# Altium PCB PCB_SIWA.PcbDoc
Units mil, origin at the board's own origin, x right, y up, seen from the top; angles counter-clockwise.
Board outline 3543.31 x 4724.41 mil, 2 copper layers (Top Layer, Bottom Layer); 54 components, 70 nets, 251 pads, 14 vias.
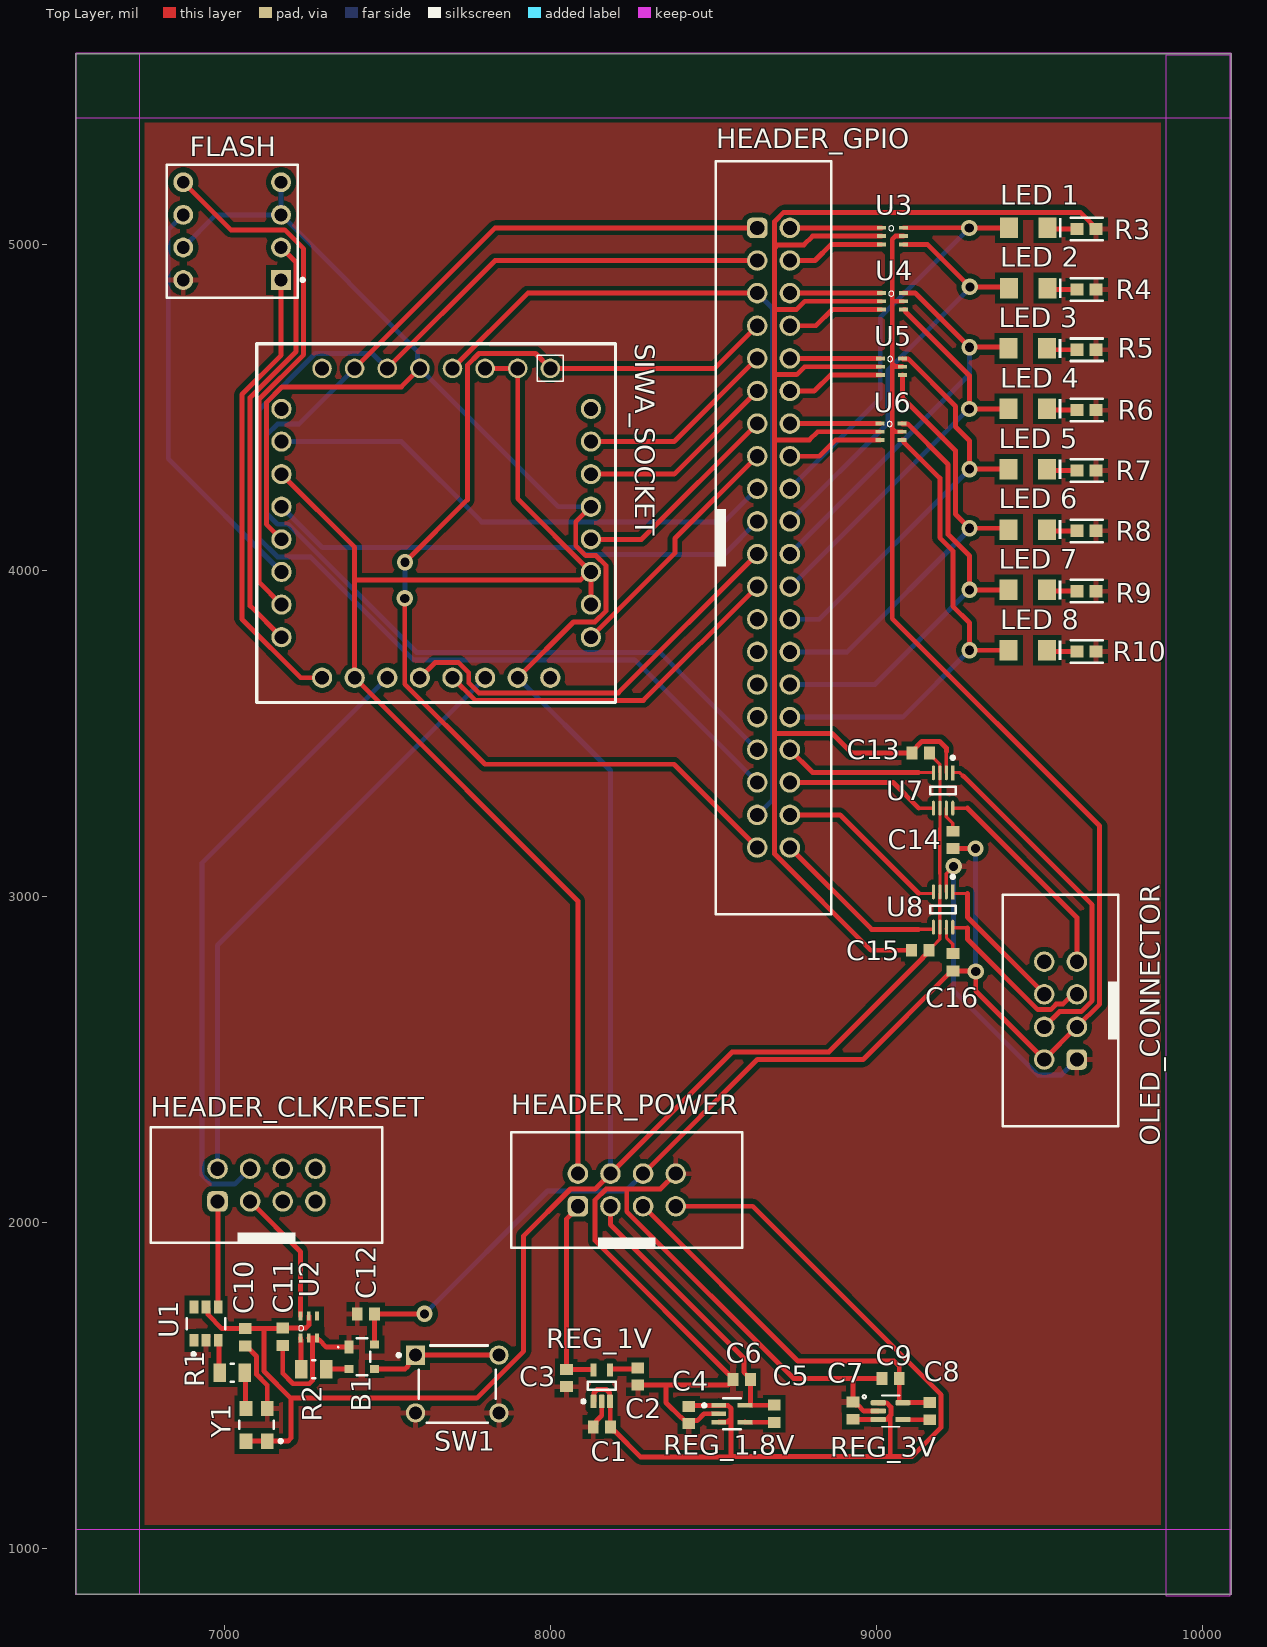
[diagram p0: Top Layer view]
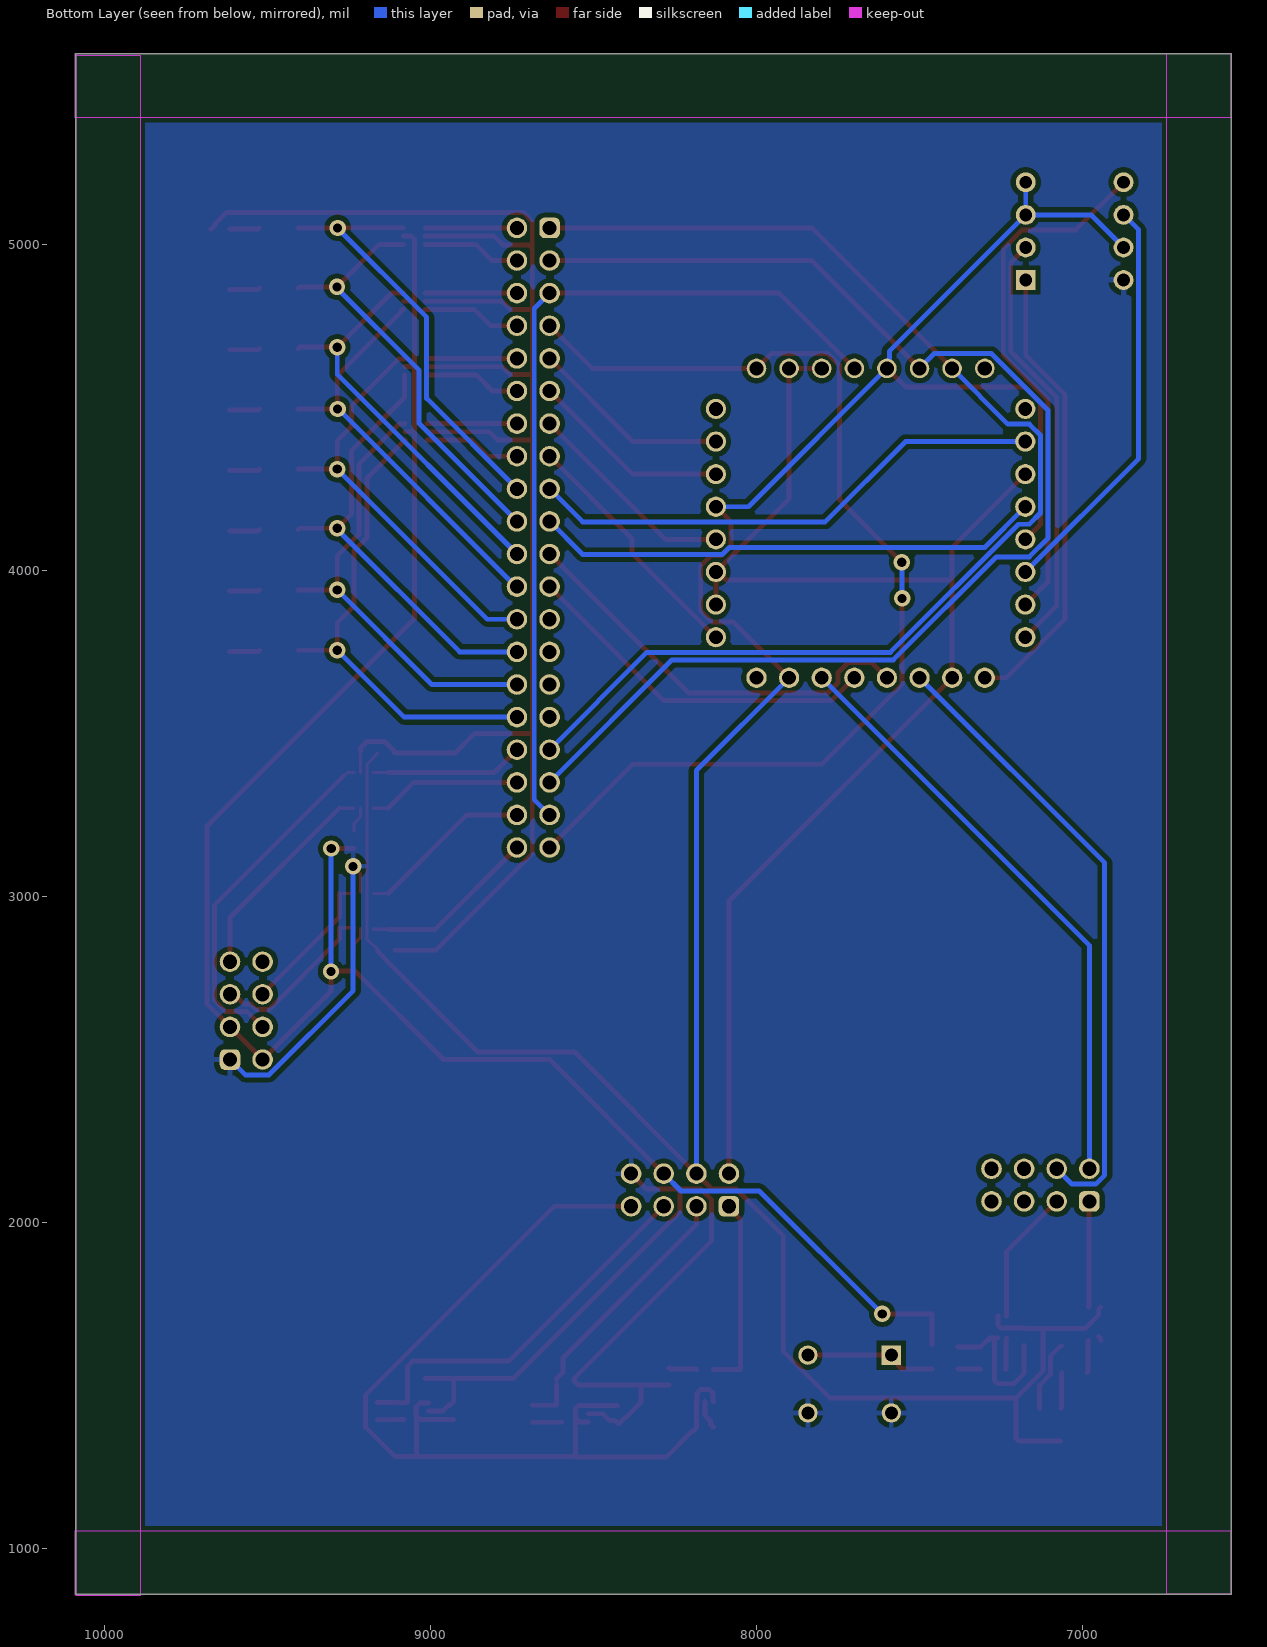
[diagram p1: Bottom Layer view, seen from below]
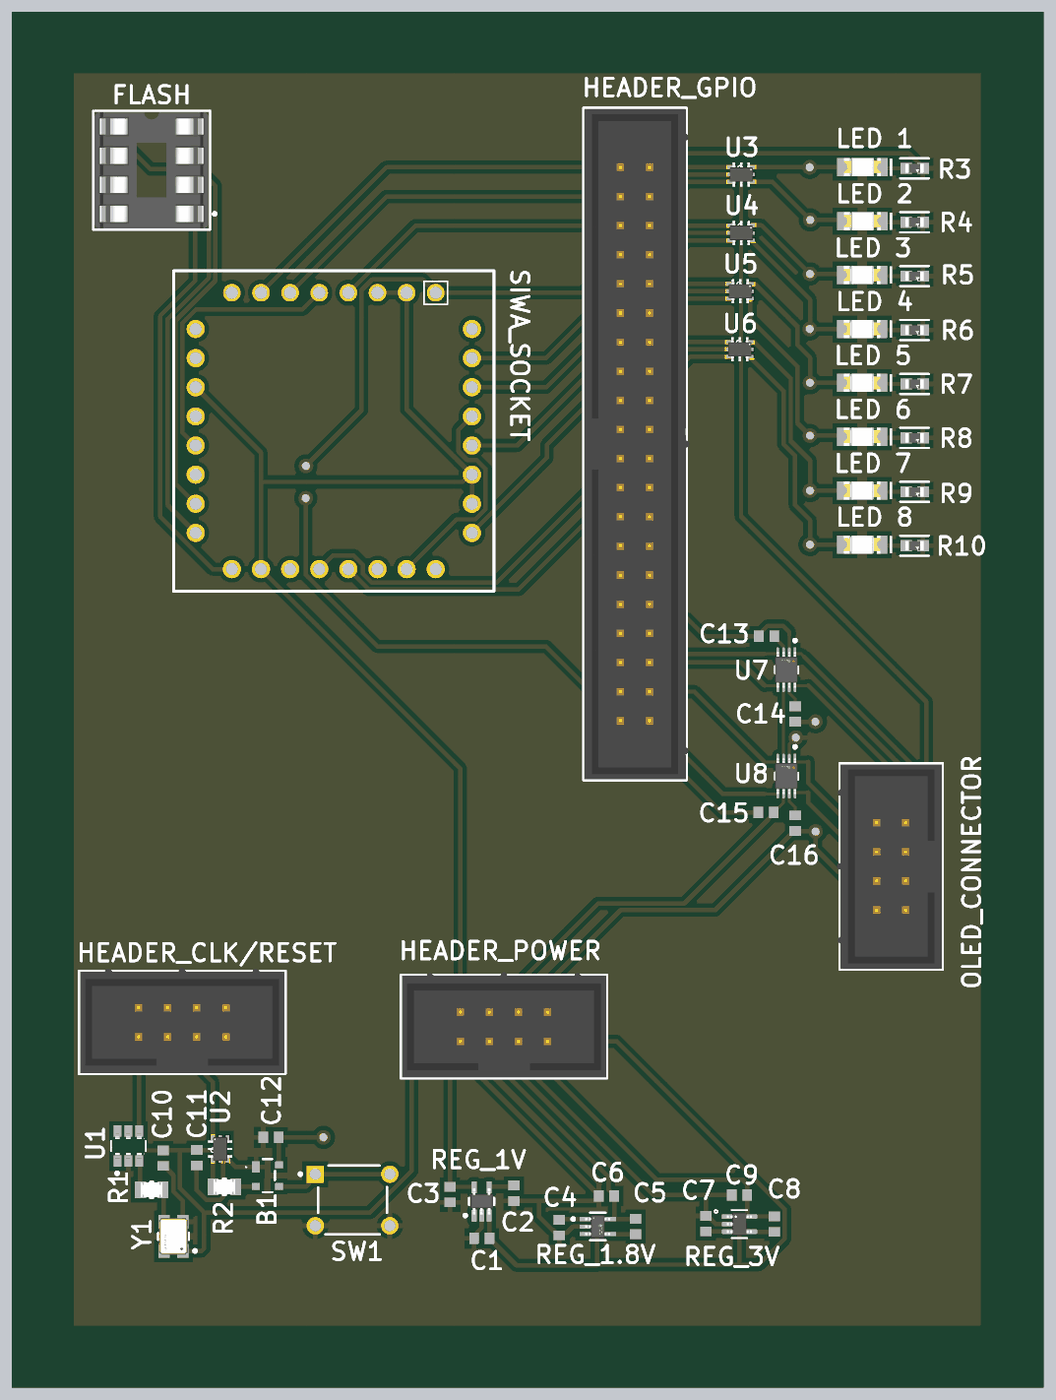
[diagram p2: 3D render of the assembled board from above, using the file's embedded part models]

## Layer stack, top to bottom
Top Solder: solder mask 0.4, Solder Resist, Dk 3.5
Top Layer: signal copper 1.4
Dielectric 1: dielectric 12.6, FR-4, Dk 4.8
Bottom Layer: signal copper 1.4
Bottom Solder: solder mask 0.4, Solder Resist, Dk 3.5

## Board outline
6545,860 6545,5584.41 10088.31,5584.41 10088.31,860

## Design rules (kind name [scope] priority, off if disabled: settings)
Clearance Polygon_Clearance_0p4mm_2 [InNamedPolygon('GND_L02_P001')] p1: gap=15 ignorepadtopadclearanceinfootprint=FALSE
Clearance Polygon_Clearance_0p4mm_1 [InNamedPolygon('GND_L01_P000')] p2: gap=15 ignorepadtopadclearanceinfootprint=FALSE
Clearance Clearance_1 [All] p3: gap=8 ignorepadtopadclearanceinfootprint=TRUE
Clearance Clearance_GND [InNet('GND')] p4: gap=16 ignorepadtopadclearanceinfootprint=TRUE
PolygonConnect [InNet('GND')] p1: connectstyle=Relief reliefconductorwidth=16 reliefentries=4 polygonreliefangle="90 Angle" airgapwidth=16
RoutingVias [All] p1: holewidth=28 width=50 viastyle="Through Hole" minholewidth=28 minwidth=50 maxholewidth=28 maxwidth=50
SolderMaskExpansion [All] p1: expansion=0 istentingtop=FALSE
Width Width_1 [All] p1: maxlimit=15 minlimit=10 preferedwidth=15
Width Width_U7/8 [InComponent('U7')And InComponent('U8')] p2: maxlimit=10 minlimit=10 preferedwidth=10
30 further rules are at their usual default settings.

## Components (designator, comment, footprint, x,y, rotation, side; value= is the part's Value field where it differs from the comment)
B1 "APX812-29UG-7" APX81229UG7 7422.8,1588.63 r270 top
C1 "VJ0603Y104KXJAP" CAPC1608X92X38NL15T08 8158.87,1373.01 r0 top
C2 "VJ0603Y104KXJAP" CAPC1608X92X38NL15T08 8268.87,1528.01 r90 top
C3 "VJ0603Y104KXJAP" CAPC1608X92X38NL15T08 8050,1523.43 r90 top
C4 "VJ0603Y104KXJAP" CAPC1608X92X38NL15T08 8425,1410 r90 top
C5 "VJ0603Y104KXJAP" CAPC1608X92X38NL15T08 8687.22,1413.79 r270 top
C6 "VJ0603Y104KXJAP" CAPC1608X92X38NL15T08 8587.22,1518.79 r0 top
C7 "VJ0603Y104KXJAP" CAPC1608X92X38NL15T08 8928.87,1423.56 r270 top
C8 "VJ0603Y104KXJAP" CAPC1608X92X38NL15T08 9163.87,1421.99 r270 top
C9 "VJ0603Y104KXJAP" CAPC1608X92X38NL15T08 9043.87,1521.99 r0 top
C10 "VJ0603Y104KXJAP" CAPC1608X92X38NL15T08 7065,1648.43 r270 top
C11 "VJ0603Y104KXJAP" CAPC1608X92X38NL15T08 7180,1650 r270 top
C12 "VJ0603Y104KXJAP" CAPC1608X92X38NL15T08 7435,1720 r180 top
C13 "VJ0603Y104KXJAP" CAPC1608X92X38NL15T08 9136.58,3440 r0 top
C14 "VJ0603Y104KXJAP" CAPC1608X92X38NL15T08 9235,3173.43 r90 top
C15 "VJ0603Y104KXJAP" CAPC1608X92X38NL15T08 9135,2835 r0 top
C16 "VJ0603Y104KXJAP" CAPC1608X92X38NL15T08 9235,2798.43 r90 top
FLASH "1-2199298-2" FP-1-2199298-2-MFG 7025,5040 r90 top
HEADER_CLK/RESET "61200821621" 61200821621 7130,2115 r0 top
HEADER_GPIO "61204021621" 61204021621 8685,4100 r270 top
HEADER_POWER "61200821621" 61200821621 8235,2100 r0 top
"LED 1" "150120BS75000" WL-SMCW_1206_150120xx75000 9465.94,5050.45 r180 top
"LED 2" "150120BS75000" WL-SMCW_1206_150120xx75000 9465.94,4865.38 r180 top
"LED 3" "150120BS75000" WL-SMCW_1206_150120xx75000 9465,4680.32 r180 top
"LED 4" "150120BS75000" WL-SMCW_1206_150120xx75000 9465,4495.25 r180 top
"LED 5" "150120BS75000" WL-SMCW_1206_150120xx75000 9465,4310.19 r180 top
"LED 6" "150120BS75000" WL-SMCW_1206_150120xx75000 9465,4125.13 r180 top
"LED 7" "150120BS75000" WL-SMCW_1206_150120xx75000 9465,3940.06 r180 top
"LED 8" "150120BS75000" WL-SMCW_1206_150120xx75000 9465,3755 r180 top
OLED_CONNECTOR "61200821621" 61200821621 9565,2650 r90 top
R1 "CRCW080550R0FKTA" FP-D12-CRCW0805-MFG 7025,1540 r180 top
R2 "CRCW080550R0FKTA" FP-D12-CRCW0805-MFG 7275,1550 r180 top
R3 "FC0603E50R0BST1" FP-FC0603-IPC_B 9645,5046.5 r0 top
R4 "FC0603E50R0BST1" FP-FC0603-IPC_B 9645,4861.43 r0 top
R5 "FC0603E50R0BST1" FP-FC0603-IPC_B 9645,4676.37 r0 top
R6 "FC0603E50R0BST1" FP-FC0603-IPC_B 9645,4491.31 r0 top
R7 "FC0603E50R0BST1" FP-FC0603-IPC_B 9645,4306.24 r0 top
R8 "FC0603E50R0BST1" FP-FC0603-IPC_B 9645,4121.18 r0 top
R9 "FC0603E50R0BST1" FP-FC0603-IPC_B 9645,3936.12 r0 top
R10 "FC0603E50R0BST1" FP-FC0603-IPC_B 9645,3751.05 r0 top
REG_1.8V "MAX8510EXK18+T" FP-X5-1-MFG 8557.22,1413.79 r0 top
REG_1V "TPS71710DCKT" DCK0005A_M 8158.28,1499.78 r90 top
REG_3V "MAX8510EXK30T" SOT65P210X110-5N 9043.87,1421.99 r0 top
SIWA_SOCKET "Comment" SIWA_socket 7650.59,4145 r270 top
SW1 "B3F-1000" OMRON-B3F-1000-4_V 7715,1505 r0 top
U1 "PL133-37TI" FP-SOT23-6LD-PL-1-MFG 6945,1690 r90 top
U2 "74LVC2G17GW,125" SOT363_INFINEON 7260,1680 r0 top
U3 "74LVC2G17GW,125" SOT363_INFINEON 9050,5025 r270 top
U4 "74LVC2G17GW,125" SOT363_INFINEON 9050,4825 r270 top
U5 "74LVC2G17GW,125" SOT363_INFINEON 9046.53,4624.41 r270 top
U6 "74LVC2G17GW,125" SOT363_INFINEON 9045,4425 r270 top
U7 "TCA9406DCUR" FP-DCU0008A-IPC_B 9205,3325 r270 top
U8 "TCA9406DCUR" FP-DCU0008A-IPC_B 9205,2960 r270 top
Y1 "ASE3-20.000MHZ-KT" FP-ASE3-MFG 7100,1380 r90 top

## Footprints (in the part's own frame and the unit in brackets; to place one, negate y for a bottom-side part, rotate by r counter-clockwise, add the part's x,y. Pads: shape width x height; smd on the part's side, far side on the other; paste and mask are expansions set on the pad)
61200821621 [mm] "8 pins, straight, gold plating"
  rrect50% 1.6x1.6 hole 1.1: 1(-3.81,-1.27)
  round 1.6 hole 1.1: 2(-3.81,1.27) 3(-1.27,-1.27) 4(-1.27,1.27) 5(1.27,-1.27) 6(1.27,1.27) 7(3.81,-1.27) 8(3.81,1.27)
  silkscreen extent -9.01,-4.5 9.01,4.5, body extent -8.91,-4.42 8.91,4.75, height 9.13
61204021621 [mm] "40 pins, straight, gold plating"
  rrect50% 1.6x1.6 hole 1.1: 1(-24.13,-1.27)
  round 1.6 hole 1.1: 2(-24.13,1.27) 3(-21.59,-1.27) 4(-21.59,1.27) 5(-19.05,-1.27) 6(-19.05,1.27) 7(-16.51,-1.27) 8(-16.51,1.27) 9(-13.97,-1.27) 10(-13.97,1.27) 11(-11.43,-1.27) 12(-11.43,1.27) 13(-8.89,-1.27) 14(-8.89,1.27) 15(-6.35,-1.27) 16(-6.35,1.27) 17(-3.81,-1.27) 18(-3.81,1.27) 19(-1.27,-1.27) 20(-1.27,1.27) 21(1.27,-1.27) 22(1.27,1.27) 23(3.81,-1.27) 24(3.81,1.27) 25(6.35,-1.27) 26(6.35,1.27) 27(8.89,-1.27) 28(8.89,1.27) 29(11.43,-1.27) 30(11.43,1.27) 31(13.97,-1.27) 32(13.97,1.27) 33(16.51,-1.27) 34(16.51,1.27) 35(19.05,-1.27) 36(19.05,1.27) 37(21.59,-1.27) 38(21.59,1.27) 39(24.13,-1.27) 40(24.13,1.27)
  silkscreen extent -29.33,-4.5 29.33,4.5, body extent -29.23,-4.42 29.23,4.75, height 9.13
APX81229UG7 [mm]
  rect 1x0.7 smd: 1(-0.75,-1)
  rect 0.6x0.7 smd: 2(0.95,-1) 3(0.95,1) 4(-0.95,1)
  silkscreen extent -1.45,-1.9 1.45,0.65
CAPC1608X92X38NL15T08 [mm] "Chip Capacitor, 2-Leads, Body 1.60x0.80mm, IPC Medium Density"
  rect 0.85x1 smd: 1(-0.675,0) 2(0.675,0)
  body extent -0.87,-0.48 0.87,0.47, height 0.92
DCK0005A_M [mm] "SOT23, 5-Leads, Body 2.15x1.4mm, Pitch 0.65mm, IPC Low Density"
  rrect22% 1.05x0.45 smd: 1(-1.225,0.65) 2(-1.225,0) 3(-1.225,-0.65) 4(1.225,-0.65) 5(1.225,0.65)
  silkscreen extent -1.35,-1.1 0.3,1.55, body extent -1.14,-1 1.14,1, height 0.94
FP-1-2199298-2-MFG [mm]
  rect 1.55x1.55 hole 1 paste-2539.97 mask+0: 1(-3.81,-3.81)
  round 1.55 hole 1 paste-2539.97 mask+0: 2(-1.27,-3.81) 3(1.27,-3.81) 4(3.81,-3.81) 5(3.81,3.81) 6(1.27,3.81) 7(-1.27,3.81) 8(-3.81,3.81)
  silkscreen extent -5.18,-5.62 5.18,5.1, body extent -5.28,-5.2 5.28,5.2, height 0.25
FP-ASE3-MFG [mm]
  rect 1.2x1 smd paste+0 mask+0: 1(-1.27,-0.825) 2(1.27,-0.825) 3(1.27,0.825) 4(-1.27,0.825)
  silkscreen extent -1.39,-2 0.29,1.35, body extent -1.97,-1.45 1.97,1.45, height 0.25
FP-D12-CRCW0805-MFG [mm]
  rect 0.95x1.45 smd paste+0 mask+0: 1(-0.975,0) 2(0.975,0)
  silkscreen extent -0.13,-0.7 0.13,0.7, body extent -1.55,-0.82 1.55,0.82, height 0.25
FP-DCU0008A-IPC_B [mm]
  rect 1.16x0.237 smd paste+0 mask+0: 1(-1.376,0.75)
  rrect100% 1.16x0.237 smd paste+0 mask+0: 2(-1.376,0.25) 3(-1.376,-0.25) 4(-1.376,-0.75) 5(1.376,-0.75) 6(1.376,-0.25) 7(1.376,0.25) 8(1.376,0.75)
  silkscreen extent -2.67,-1 0.3,1, body extent -2.21,-1.25 2.21,1.25, height 0.25
FP-FC0603-IPC_B [mil]
  rect 40.04x37.38 smd paste+0 mask+0: 1(-28.92,0) 2(28.92,0)
  silkscreen extent -49,-34 49,34, body extent -59,-29 59,29, height 10
FP-SOT23-6LD-PL-1-MFG [mm]
  rect 0.99x0.69 smd: 1(-1.295,0.95) 2(-1.295,0) 3(-1.295,-0.95) 4(1.295,-0.95) 5(1.295,0) 6(1.295,0.95)
  silkscreen extent -2.5,-1.5 0.42,1.5, body extent -1.89,-1.6 1.89,1.6, height 0.25
FP-X5-1-MFG [mm]
  rect 1.15x0.35 smd paste+0 mask+0: 1(-1.025,0.65) 2(-1.025,0) 3(-1.025,-0.65) 4(1.025,-0.65) 5(1.025,0.65)
  silkscreen extent -2.27,-1.2 0.67,1.2, body extent -1.7,-1.2 1.7,1.2, height 0.25
OMRON-B3F-1000-4_V [mm] "TH, 4-Leads, Body 6x6mm"
  rect 1.5x1.5 hole 1 paste-2539.97: 1(-3.25,2.25)
  round 1.5 hole 1 paste-2539.97: 2(3.25,2.25) 3(-3.25,-2.25) 4(3.25,-2.25)
  silkscreen extent -4.67,-3 3,3, body extent -3,-3 3,3, height 4.5
SIWA_socket [mil]
  round 60 hole 43.31: 01(-474.41,-350) 05(-474.41,350) 06(-474.41,250) 07(-474.41,150) 08(-474.41,50) 09(-474.41,-50) 10(-474.41,-150) 13(-474.41,-250)
  round 62 hole 42 paste-99999 mask+0: 21(-250,-474.41) 22(-150,-474.41) 24(-50,-474.41) 25(50,-474.41) 26(150,-474.41) 28(250,-474.41) 29(350,-474.41) 32(-350,-474.41) 36(474.41,-350) 37(474.41,-250) 38(474.41,-150) 39(474.41,-50) 40(474.41,50) 42(474.41,150) 44(474.41,250) 48(474.41,350) 49(-350,474.41) 53(350,474.41) 54(250,474.41) 55(150,474.41) 56(50,474.41) 57(-50,474.41) 58(-150,474.41) 61(-250,474.41)
  silkscreen extent -550,-550 550,550
SOT65P210X110-5N [mm]
  rrect50% 1.19x0.4 smd: 1(-0.96,0.65) 2(-0.96,0) 3(-0.96,-0.65) 4(0.96,-0.65) 5(0.96,0.65)
  silkscreen extent -2.17,-1.22 0.68,1.24, body extent -1.1,-1 1.1,1, height 1.1
SOT363_INFINEON [mm]
  rect 0.3x0.7 smd paste+0 mask+0.102: 1(-0.65,-0.85) 2(0,-0.85) 3(0.65,-0.85) 4(0.65,0.85) 5(0,0.85) 6(-0.65,0.85)
  silkscreen extent -0.8,-0.3 -0.4,0.1, body extent -1.05,-1.02 1.05,1.02, height 1.1
WL-SMCW_1206_150120xx75000 [mm] "SMD Mono-color Chip LED, body 3.2x1.6mm"
  rect 1.4x1.6 smd: 1(-1.5,0) 2(1.5,0)
  silkscreen extent -2.6,-0.75 -2.4,0.75, body extent -1.6,-0.8 1.6,0.8, height 0.68

## Part data
B1: "Supervisor Push-Pull, Totem Pole 1 Channel SOT-143 , 2.93V , 140ms , -40C ~ 85C (TA)", Manufacturer_Name="Diodes Incorporated", Datasheet Link=https://www.diodes.com//assets/Datasheets/APX811_812.pdf, Geometry.Height=1.1mm, Manufacturer_Part_Number=APX812-29UG-7
C1 C2 C3 C4 C5 C6 C7 C8 C9 C10 C11 C12 C13 C14 C15 C16: library part CMP-2006-01211-1, Manufacturer=Vitramon, Part Number=VJ0603Y104KXJAP
FLASH: library part CMP-03370-000009-1, "CONN IC DIP SOCKET 8POS TIN", Color=Black, Contact Current Rating=1A, Contact Resistance=20mR, Flammability Rating="UL94 V-0", Insulation Resistance=1GR, Max Operating Temperature=105°C, Min Operating Temperature=-40°C, Package Quantity=60, Connector Type=Pin, Contact Finish - Mating=TIN, Contact Material=Bronze, Contact Plating=Tin, Contact Post Length=3inch, ELV=Compliant, Housing Material=PBT, Lead Free="Lead Free", Lead Pitch=2.54mm, Length=0.4inch, Mating Alignment="Yes (With)", Mount="Through Hole", Number of Contacts=8, Number of Positions=8, Number of Rows=2, Orientation=Straight, Packaging=Rail/Tube, Pitch=2.54mm, Radiation Hardening=No, RoHS Compliant=Yes, Row Spacing=0.3inch, Series="Diplomate DL", Termination="Through Hole"
HEADER_CLK/RESET HEADER_POWER OLED_CONNECTOR: library part CMP-1502-00006-3, "Wr-bhd; 2.54MM Pitch 8 Way 2 Row Shrouded Straight Pcb Header, Surface Mount", Color=Black, Contact Resistance=20mΩ, Current Rating=3A, Insulation Resistance=1GΩ, Max Operating Temperature=105°C, Min Operating Temperature=-40°C, Operating Supply Voltage=250V, Connector Type="Male Pin", Contact Material=Copper, Contact Plating=Gold, Gender=Male, Insulation Material=PBT, Lead Pitch=2.54mm, Length=17.82mm, Mount="Through Hole", Number of Contacts=8, Number of Pins=8, Number of Positions=8, Number of Rows=2, Orientation=Vertical, Pitch=2.54mm, RoHS=Compliant, Row Spacing=2.54mm, Termination=Solder
HEADER_GPIO: library part CMP-1502-00015-4, "WR-BHD Straight Male, Box Header, Through Hole, 2 Rows, 40 Contacts, 2.54mm Pitch", Color=Black, Contact Resistance=20mΩ, Current Rating=3A, Insulation Resistance=1GΩ, Max Operating Temperature=105°C, Min Operating Temperature=-40°C, Operating Supply Voltage=250V, Connector Type="Male Pin", Contact Material=Gold, Contact Plating=Gold, Gender=Male, Height=9.25mm, Insulation Material=PBT, Lead Pitch=2.54mm, Length=58.46mm, Mount="Through Hole", Number of Contacts=40, Number of Pins=40, Number of Positions=40, Number of Rows=2, Orientation=Vertical, Pitch=2.54mm, REACH SVHC=Unknown, RoHS=Compliant, Row Spacing=2.54mm, Termination=Solder, Voltage Rating=250V
"LED 1" "LED 2" "LED 3" "LED 4" "LED 5" "LED 6" "LED 7" "LED 8": library part CMP-1426-00015-3, "WL-SMCW SMT Mono-Color Chip LED Waterclear", Case Code (Imperial)=1206, Case Code (Metric)=3216, Color=Blue, Forward Current=100mA, Forward Voltage=3.2V, Manufacturer Package Identifier=LED_1206, Max Operating Temperature=85°C, Max Reverse Voltage (DC)=5V, Min Operating Temperature=-40°C, Test Current=20mA, Case/Package=1206, Dominant Wavelength=470nm, Height=680µm, Length=3.2mm, Lens Style="Clear, Rectangular", Luminous Intensity=145mcd, Mount="Surface Mount", Packaging="Tape and Reel", Peak Wavelength=465nm, REACH SVHC=Unknown, RoHS=Compliant, Viewing Angle=140°, Wavelength=470nm, Width=1.6mm
R1 R2: library part CMP-00030-21390498-1, "CRCW080550R0FKTA Res Thick Film 0805 50 Ohm 1% 0.125W(1/8W) ±100ppm/C Pad SMD Automotive T/R", Case Code (Imperial)=0805, Case Code (Metric)=2012, Max Operating Temperature=155°C, Min Operating Temperature=-55°C, Power Rating=125mW, Resistance=50Ω, Temperature Coefficient=100ppm/°C, Tolerance=1%, Voltage Rating=150V, Case/Package=0805, Composition="Thick Film", Contact Plating="Lead, Tin", Height=450µm, Lead Free="Contains Lead", Length=2mm, NexarPartId=21390498, RoHS=Non-Compliant, Weight=5.499807mg, Width=1.25mm
R3 R4 R5 R6 R7 R8 R9 R10: library part CMP-02407-013076-1, "RES SMD 50 OHM 0.1% 1/8W 0603"
REG_1.8V: library part CMP-0246-00401-2, "IC REG LINEAR 1.8V 120MA SC70-5", Case/Package=SC, Input Bias Current=40uA, Max Input Voltage=6V, Max Operating Temperature=85°C, Max Output Current=120mA, Max Power Dissipation=247mW, Min Current Limit=130mA, Min Input Voltage=2V, Min Operating Temperature=-40°C, Nominal Output Voltage=1.8V, Package Quantity=2500, Power Supply Rejection Ratio (PSRR)=54dB, Quiescent Current=90uA, Reference Voltage=1.225V, Accuracy=2%, Lead Free="Lead Free", Mount="Surface Mount", Number of Outputs=1, Number of Pins=5, Number of Regulators=1, Output Configuration=Positive, Output Current=120mA, Output Type=Fixed, Output Voltage=1.8V, Packaging="Tape and Reel", Polarity=Positive, RoHS Compliant=Yes, Series=-
REG_1V: library part CMP-0394-00843-2, "Single Output High PSRR LDO, 150 mA, Fixed 1 V Output, 2.5 to 6.5 V Input, with Low IQ, 5-pin SC70 (DCK), -40 to 85 degC, Green (RoHS & no Sb/Br)", Manufacturer="Texas Instruments", Accuracy(%)=3, Code_JEDEC=MO-203, ComponentLink1Description="Manufacturer URL", ComponentLink1URL=http://www.ti.com/, ComponentLink2Description=Datasheet, ComponentLink2URL=http://www.ti.com/general/docs/lit/getliterature.tsp?genericPartNumber=TPS71710&fileType=pdf, ComponentLink3Description="Package Specification", ComponentLink3URL=http://www.ti.com/litv/pdf/mpds025f, DatasheetVersion=SBVS068G, Eco-Plan="Green (RoHS & no Sb/Br)", Fixed Output Options(V)=1, Iout(Max)(A)=0.15, Iq(Typ)(mA)=0.05, Mounting Technology="Surface Mount", PackageDescription="5-Pin Plastic Small-Outline, Body 2 x 1.25 mm, Pitch 0.65 mm", PackageReference=DCK0005A, PackageVersion=4093553-3/G, PartNumber=TPS71710DCKT, SubFamily="Single Channel LDO", Vdo(Typ)(mV)=170, Vin(Max)(V)=6.5, Vin(Min)(V)=2.5, Vout Adj(Max)(V)=1, Vout Adj(Min)(V)=1
REG_3V: "DoÄŸrusal Voltaj RegÃ¼latÃ¶rÃ¼ IC Pozitif Sabit 1 Ã‡Ä±kÄ±ÅŸ 120mA SC-70-5", Package="SC-70-5 Maxim", Check_prices=https://www.snapeda.com/parts/MAX8510EXK30+T/Maxim+Integrated/view-part/?ref=eda, MF="Maxim Integrated Products", MP=MAX8510EXK30+T, SnapEDA_Link=https://www.snapeda.com/parts/MAX8510EXK30+T/Maxim+Integrated/view-part/?ref=snap
SW1: library part CMP-1677-00002-1, "Tactile Switch, SPST-NO, 0.05 A, 5 to 24 V, -25 to 70 degC, 4-Pin THD, RoHS, Bulk", Capacitance="-45 f", Current Rating="1.5 A", Max Operating Temperature="70 degC", Min Operating Temperature="-40 degC", Package Quantity=1080, Voltage Rating="150 V", ComponentLink1Description="Manufacturer URL", ComponentLink1URL=http://www.omron.com/, ComponentLink2Description=Datasheet, ComponentLink2URL=http://www.omron.com/ecb/products/pdf/en-b3f.pdf, Contact Material=Brass, Contact Plating=Gold, DatasheetVersion=Jan-15, Gender=Female, Height="14.99 mm", Lead Pitch="1.27 mm", Length="18.34 mm", Mount="Through Hole", PackageDescription="4-Pin Through Hole Device, Body 6 x 6 mm", PackageReference=B3F-1000, Packaging=Tray, Pins=8, Radiation Hardening=No, RoHSCompliant=true, Shielding=Shielded, Width="25.4 mm"
U1: library part CMP-00252-66952958-1, "PL133-37TI LVCMOS Sine Wave PL133 SOT-23-6 R-PDSO-G6 clock driver 0.95mm 1.62V~3.63V 150MHz -40C~85C", Max Frequency=150MHz, Max Operating Temperature=85°C, Max Supply Voltage=3.63V, Min Operating Temperature=-40°C, Min Supply Voltage=1.62V, Height=1.45mm, Input=LVCMOS, Lead Free="Lead Free", Lifecycle Status=Production, Logic Function=Inverting, Mount="Surface Mount", Number of Circuits=1, Number of Elements=1, Number of Inputs=1, Number of Outputs=3, RoHS=Compliant, Schedule B="8542390000, 8542390000"
U2 U3 U4 U5 U6: "Buffer, Non-Inverting 2 Element 1 Bit per Element Push-Pull Output 6-TSSOP", Package="TSSOP6-6 Nexperia USA Inc.", Check_prices=https://www.snapeda.com/parts/74LVC2G17GW,125/Nexperia/view-part/?ref=eda, MF="Nexperia USA", MP=74LVC2G17GW,125, SnapEDA_Link=https://www.snapeda.com/parts/74LVC2G17GW,125/Nexperia/view-part/?ref=snap
U7 U8: library part CMP-0314-00417-3, "IC TRNSLTR BIDIRECTIONAL US8", Case/Package=VSSOP, High Level Output Current=-50mA, Low Level Output Current=50mA, Max Operating Temperature=85°C, Max Supply Voltage=5.5V, Min Operating Temperature=-40°C, Min Supply Voltage=1.65V, Package Quantity=1, Contact Plating=Gold, Data Rate=24Mbps, Height=0.8mm, Lead Free="Lead Free", Length=2.1mm, Logic Function=Translator, Number of Bits=2, Number of Channels=2, Number of Outputs=2, Number of Pins=8, Output Type=Voltage, Packaging="Tape and Reel", Propagation Delay=4.4ns, Radiation Hardening=No, REACH SVHC="No SVHC", Turn-On Delay Time=260ns, Weight=0.00067oz, Width=2.4mm
Y1: library part CMP-27762-010045-1, "XTAL OSC XO 20.0000MHZ CMOS SMD", Case/Package=SMD/SMT, Frequency=20MHz, Frequency Stability=30ppm, Load Capacitance=15pF, Max Operating Temperature=70°C, Max Supply Current=4mA, Max Supply Voltage=1.89V, Min Operating Temperature=-10°C, Min Supply Voltage=1.71V, Operating Supply Voltage=1.8V, Package Quantity=1000, Depth=2.5mm, Height=0.049inch, Lead Free="Lead Free", Length=3.2mm, Mount="Surface Mount", Number of Pins=4, Packaging="Tape and Reel", Radiation Hardening=No, Series=ASE3, Termination=SMD/SMT, Width=0.098inch

## Via types
v1: diameter 50, hole 28, Top Layer to Bottom Layer, tented both sides, 14 vias

## Nets (pads, with @x,y where several pads share a name; then routed paths per layer and width w, separated by ;. In a path a pad name is that pad's centre, name@x,y a point inside that pad or via, vN(x,y) a via of type N, cw(c..) or ccw(c..) an arc to the next point about the centre after c; other vN are vias at no path point)
CLK: HEADER_CLK/RESET.2 SIWA_SOCKET.42 | length 1845.5
  Bottom Layer w15: HEADER_CLK/RESET.2 6980,2850 SIWA_SOCKET.42
GND: B1.1 C1.1 C2.1 C3.1 C4.1 C6.1 C7.1 C9.1 C10.2 C11.2 C12.2 C13.1 C15.1 FLASH.8 HEADER_POWER.8 OLED_CONNECTOR.1 R3.2 R4.2 R5.2 R6.2 R7.2 R8.2 R9.2 R10.2 REG_1.8V.2 REG_1V.2 REG_3V.2 SW1.3 SW1.4 U1.2 U2.2 U2.3 U3.2 U4.2 U5.2 U6.2 U7.2 U8.2 Y1.2 | length 10055.7
  Top Layer w10: U8.2 9214.84,3069.84 v1(9237.27,3092.27) ; U7.2 9214.84,3444.84
  Top Layer w15: U1.2 6945,1644.92 U1.2@6951.32,1651.24 ; C10.2 7067.95,1621.85 7099.5,1590.3 7099.5,1534.62 7132.48,1501.64 Y1.2 ; C11.2 7180,1537.45 7211.49,1505.96 7261.74,1505.96 7270.81,1515.04 7270.81,1644.56 7272.8,1646.54 ; U2.2 7272.8,1646.54 ; B1.1 7313.97,1618.15 7291.87,1640.26 7287.18,1640.26 7285.59,1641.85 U2.3 7272.8,1646.54 ; C1.1 8141.53,1382.24 8141.53,1391.63 8158.28,1408.39 REG_1V.2 ; C2.1 8355,1501.44 ; HEADER_POWER.8 8338,2103 8235,2103 ; REG_1.8V.2 8471.72,1413.79 8450.6,1392.66 8434.23,1392.66 C4.1 8422.05,1383.43 8402.21,1403.27 8399.97,1403.27 8355,1448.24 8355,1501.44 ; REG_3V.2 8962.21,1421.99 8943.29,1440.9 8938.1,1440.9 C7.1 8928.87,1520.86 8930,1521.99 ; U6.2 8820,4425 8795,4400 8688,4400 ; U5.2 8780.42,4624.41 8756.01,4600 8688,4600 ; U4.2 8781.01,4825 8756.01,4800 8688,4800 ; U3.2 8805,5025 8778,4998 8698,4998 8688,4988 ; C9.1 8930,1521.99 ; C15.1 8983.54,2835 8688,3130.53 8688,3500 ; C13.1@9108.88,3444.07 9140,3475.19 9194.81,3475.19 9214.84,3455.16 9214.84,3444.84 ; C13.1@9110,3442.95 C13.1 8924.39,3440 8864.39,3500 8688,3500 ; R3.2 9672.59,5046.5 9661.4,5057.69 9661.4,5061.82 9651.6,5071.61 9625.77,5097.44 8715.98,5097.44 8688,5069.47 8688,4988 ; 8235,2103 8235,2033.54 8746.55,1521.99 8930,1521.99 ; 8235,2103 8171.54,2103 8138,2069.47 8138,1944.38 8560.64,1521.74 C6.1 8560.64,1515.83 8546.25,1501.44 8355,1501.44 ; 8688,3500 8688,4400 ; 8688,4400 8688,4600 ; 8688,4600 8688,4800 ; 8688,4800 8688,4988
  Bottom Layer w15: v1(9237.27,3092.27) 9237.27,2711.27 9495.53,2453 9568,2453 OLED_CONNECTOR.1
GPIO_0: HEADER_GPIO.1 HEADER_GPIO.33 SIWA_SOCKET.13 | length 3813.1
  Top Layer w15: SIWA_SOCKET.13 7831.18,5050 HEADER_GPIO.1
  Bottom Layer w15: SIWA_SOCKET.13 7229.68,4448.5 7163.92,4448.5 7129.68,4414.26 7129.68,4175.74 7163.92,4141.5 7197.15,4141.5 7590.15,3748.5 8336.5,3748.5 HEADER_GPIO.33
GPIO_1: HEADER_GPIO.3 HEADER_GPIO.35 SIWA_SOCKET.10 | length 3987
  Top Layer w15: SIWA_SOCKET.10 7831.18,4950 HEADER_GPIO.3
  Bottom Layer w15: SIWA_SOCKET.10 7455.09,4664.91 7280.33,4664.91 7106.68,4491.26 7106.68,4098.74 7163.92,4041.5 7264.63,4041.5 7580.63,3725.5 8259.5,3725.5 HEADER_GPIO.35
GPIO_2: HEADER_GPIO.5 HEADER_GPIO.37 SIWA_SOCKET.08 | length 2668.9
  Top Layer w15: SIWA_SOCKET.08 7931.18,4850 HEADER_GPIO.5
  Bottom Layer w15: HEADER_GPIO.37 8682,3297 8682,4803 HEADER_GPIO.5
GPIO_3: HEADER_GPIO.7 HEADER_GPIO.39 SIWA_SOCKET.05 | length 3322.6
  Top Layer w15: v1(7554.09,3914.09) 7554.09,3651.33 7800.16,3405.26 8379.74,3405.26 HEADER_GPIO.39 ; v1(7555,4025) 7746.09,4216.09 7746.09,4629.26 7781.74,4664.91 7955.09,4664.91 SIWA_SOCKET.05 8504.41,4619.41 HEADER_GPIO.7
  Bottom Layer w15: v1(7554.09,3914.09) 7554.55,3914.55 7554.55,4024.55 v1(7555,4025)
GPIO_4: HEADER_GPIO.9 SIWA_SOCKET.61 | length 615.6
  Top Layer w15: SIWA_SOCKET.61 8380,4395 HEADER_GPIO.9
GPIO_5: HEADER_GPIO.11 SIWA_SOCKET.58 | length 615.6
  Top Layer w15: SIWA_SOCKET.58 8380,4295 HEADER_GPIO.11
GPIO_6: HEADER_GPIO.13 SIWA_SOCKET.56 | length 657
  Top Layer w15: SIWA_SOCKET.56 8280,4095 HEADER_GPIO.13
GPIO_7: HEADER_GPIO.15 SIWA_SOCKET.53 | length 766.2
  Top Layer w15: SIWA_SOCKET.53 8382.66,4052.66 8382.66,4097.66 HEADER_GPIO.15
"LED 1": "LED 1.2" HEADER_GPIO.18 U3.6 | length 1354.4
  Top Layer w15: U3.6 v1@9286.75,5050.59 ; v1(9285,5050) 9406.44,5050 9406.89,5050.45
  Bottom Layer w15: HEADER_GPIO.18 9012.19,4527.19 9012.19,4775.74 v1@9286.89,5050.45
"LED 2": "LED 2.2" HEADER_GPIO.20 U3.4 | length 1322.9
  Top Layer w15: U3.4 9156.8,4999.41 v1(9286.89,4869.32) 9402.95,4869.32 9406.89,4865.38
  Bottom Layer w15: HEADER_GPIO.20 9035.19,4450.19 9035.19,4613.68 v1@9286.89,4865.38
"LED 3": "LED 3.2" HEADER_GPIO.22 U4.6 | length 1255.5
  Top Layer w15: U4.6 9119.61,4850.59 v1(9285.94,4684.26) 9402.01,4684.26 9405.94,4680.32
  Bottom Layer w15: HEADER_GPIO.22 9285.94,4600.94 v1(9285.94,4684.26)
"LED 4": "LED 4.2" HEADER_GPIO.24 U4.4 | length 1286.4
  Top Layer w15: U4.4 9088.15,4799.41 9089.74,4797.82 9089.74,4793.13 9285.94,4596.93 9285.94,4495.94 v1(9285,4495) 9405.69,4495 9405.94,4495.25
  Bottom Layer w15: HEADER_GPIO.24 8737.84,3950 v1@9283.1,4495.25
"LED 5": "LED 5.2" HEADER_GPIO.26 U5.6 | length 1296.1
  Top Layer w15: U5.6 9081.59,4648.41 9097.61,4648.41 9242.88,4503.13 9242.88,4440.19 9285.94,4397.13 v1(9285.94,4310.19) 9405.94,4310.19
  Bottom Layer w15: HEADER_GPIO.26 8825.75,3850 v1(9285.94,4310.19)
"LED 6": "LED 6.2" HEADER_GPIO.28 U5.4 | length 1383
  Top Layer w15: U5.4 9080,4530 9242.88,4367.12 9242.88,4172.12 v1(9285.94,4129.06) 9402.01,4129.06 9405.94,4125.13
  Bottom Layer w15: HEADER_GPIO.28 8910.82,3750 v1@9285.94,4125.13
"LED 7": "LED 7.2" HEADER_GPIO.30 U6.6 | length 1396.9
  Top Layer w15: U6.6 9080.06,4449 9096.08,4449 9219.88,4325.19 9219.88,4110.21 9285.94,4044.15 v1(9285.94,3940.06) 9405.94,3940.06
  Bottom Layer w15: HEADER_GPIO.30 8995.88,3650 v1(9285.94,3940.06)
"LED 8": "LED 8.2" HEADER_GPIO.32 U6.4 | length 1489
  Top Layer w15: U6.4 9083.15,4399.41 9084.74,4397.82 9084.74,4393.13 9195,4282.88 9195,4100 9235,4060 9235,3890 9285.94,3839.06 v1(9285.94,3755) 9405.94,3755
  Bottom Layer w15: HEADER_GPIO.32 9080.94,3550 v1(9285.94,3755)
MAIP: HEADER_GPIO.21 SIWA_SOCKET.39 | length 1287.1
  Top Layer w15: SIWA_SOCKET.39 7647.09,3717.09 7719.85,3717.09 7750.59,3686.35 7750.59,3654.83 7781.33,3624.09 8209.09,3624.09 HEADER_GPIO.21
MISO: FLASH.2 SIWA_SOCKET.29 | length 1312.3
  Top Layer w15: FLASH.2 7221.01,4943.99 7221.01,4671.01 7080,4530 7080,3891.18 SIWA_SOCKET.29
MOSI: FLASH.5 SIWA_SOCKET.28 | length 1630.2
  Top Layer w15: FLASH.5 7021.01,5043.99 7186.08,5043.99 7244.01,4986.06 7244.01,4661.12 7106.68,4523.79 7106.68,3964.5 SIWA_SOCKET.28
NetB1_2: B1.2 R2.1 | length 70.5
  Top Layer w15: R2.1 7314.61,1551.23 B1.2
NetB1_3: B1.3 SW1.1 SW1.2 | length 404.7
  Top Layer w15: B1.3 7555.59,1551.23 7561.42,1557.05 7565.02,1560.65 7565.02,1571.55 SW1.1 SW1.2
NetC2_2: C2.2 REG_1V.4 | length 88.9
  Top Layer w15: REG_1V.4 8183.87,1549.94 8185.23,1551.3 8265.58,1551.3 C2.2
NetC3_2: C3.2 HEADER_POWER.1 REG_1V.5 | length 598.4
  Top Layer w15: HEADER_POWER.1 8085,2045.54 8050,2010.54 C3.2 8131.33,1550 8132.69,1548.64 REG_1V.5
NetC5_1: C5.1 C6.2 HEADER_POWER.3 REG_1.8V.5 | length 846.5
  Top Layer w15: HEADER_POWER.3 8185,1993.77 8593.95,1584.82 8593.95,1541.58 8613.79,1521.74 C6.2 ; C6.2@8613.79,1503.79 8613.79,1439.99 8613.67,1439.87 8686.72,1439.87 C5.1
NetC5_2: C5.2 REG_1.8V.4 | length 90.1
  Top Layer w15: REG_1.8V.4 8598.06,1387.7 8686.72,1387.7 C5.2
NetC8_1: C8.1 C9.2 HEADER_POWER.5 REG_3V.5 | length 1194.2
  Top Layer w15: HEADER_POWER.5 8760,1575 9055,1575 9070.44,1559.56 C9.2 9070.44,1447.95 9070.82,1447.58 REG_3V.5 9097.22,1447.58 9098.2,1448.56 C8.1
NetC8_2: C8.2 REG_3V.4 | length 82.6
  Top Layer w15: REG_3V.4 9097.22,1396.4 9098.2,1395.41 C8.2
NetC14_2: C14.2 U7.7 | length 79.2
  Top Layer w10: U7.7 9214.84,3244.17 9234.5,3224.51 9234.5,3200.5 C14.2
NetC16_2: C16.2 U8.7 | length 84.2
  Top Layer w10: U8.7@9214.68,2900.83 9215.02,2900.49 9215.02,2873.83 9234.68,2854.17 9234.68,2825.32 C16.2
NetHEADER_CLK/RESET_1: HEADER_CLK/RESET.1 U1.4 | length 325
  Top Layer w15: HEADER_CLK/RESET.1 6981.2,2063.8 6981.2,1742.18 U1.4
NetHEADER_CLK/RESET_3: HEADER_CLK/RESET.3 U2.6 | length 415.5
  Top Layer w15: HEADER_CLK/RESET.3 7234.41,1910.59 U2.6
"NetLED 1_1": "LED 1.1" R3.1 | length 92.7
  Top Layer w15: 9525,5050.45 9528.95,5046.5 R3.1
"NetLED 2_1": "LED 2.1" R4.1 | length 92.7
  Top Layer w15: 9525,4865.38 9528.95,4861.43 R4.1
"NetLED 3_1": "LED 3.1" R5.1 | length 93.7
  Top Layer w15: 9524.06,4680.32 9528,4676.37 R5.1
"NetLED 4_1": "LED 4.1" R6.1 | length 93.7
  Top Layer w15: 9524.06,4495.25 9528,4491.31 R6.1
"NetLED 5_1": "LED 5.1" R7.1 | length 93.7
  Top Layer w15: 9524.06,4310.19 9528,4306.24 R7.1
"NetLED 6_1": "LED 6.1" R8.1 | length 93.7
  Top Layer w15: 9524.06,4125.13 9528,4121.18 R8.1
"NetLED 7_1": "LED 7.1" R9.1 | length 93.7
  Top Layer w15: 9524.06,3940.06 9528,3936.12 R9.1
"NetLED 8_1": "LED 8.1" R10.1 | length 93.7
  Top Layer w15: 9524.06,3755 9528,3751.05 R10.1
NetR1_1: R1.1 Y1.3 | length 111.7
  Top Layer w15: R1.1 7065.45,1537.93 7065.45,1432.07 Y1.3
NetR1_2: R1.2 U1.3 | length 100.8
  Top Layer w15: U1.3 6984.51,1636.91 6984.51,1542.11 R1.2
NetR2_2: R2.2 U2.1 | length 97.4
  Top Layer w15: U2.1 7234.41,1641.36 7235.51,1640.26 7235.51,1551.1 R2.2
POC_CON: HEADER_GPIO.23 SIWA_SOCKET.40 | length 1107.7
  Top Layer w15: SIWA_SOCKET.40 7770.09,3601.09 8286.09,3601.09 HEADER_GPIO.23
RES: OLED_CONNECTOR.7 U7.8 | length 654.9
  Top Layer w10: U7.8 9279.66,3270.83
  Top Layer w15: 9279.66,3270.83 9615,2935.49 OLED_CONNECTOR.7
Reset: HEADER_CLK/RESET.4 SIWA_SOCKET.38 | length 1938
  Bottom Layer w15: HEADER_CLK/RESET.4 7033,2118 6960.53,2118 6933,2145.53 6933,3103 SIWA_SOCKET.38
SA0: OLED_CONNECTOR.4 U7.1 | length 1070.1
  Top Layer w10: U7.1 9234.53,3379.66 9234.87,3380 9256.01,3380 9266.24,3369.77
  Top Layer w15: 9266.24,3369.77 9662,2974.01 9662,2680.53 9628.46,2647 9562,2647 OLED_CONNECTOR.4
SCL: OLED_CONNECTOR.5 U8.8 | length 528
  Top Layer w10: U8.8@9234.37,2900.83 9234.37,2903.83 9234.71,2904.17 9279.68,2904.17
  Top Layer w15: 9279.68,2904.17 9279.68,2868.85 9495.53,2653 9534.47,2653 9551.46,2670 9572.01,2670 9602.01,2700 OLED_CONNECTOR.5
SCLK: FLASH.6 SIWA_SOCKET.26 | length 1257.9
  Bottom Layer w15: FLASH.6 6828.99,5043.99 6828.99,4342.19 SIWA_SOCKET.26
SCS: FLASH.1 SIWA_SOCKET.36 | length 1409.4
  Top Layer w15: FLASH.1 7175,4660 7055,4540 7055,3850.42 7234.83,3670.59 SIWA_SOCKET.36
SDA: OLED_CONNECTOR.6 U8.1 | length 452
  Top Layer w10: U8.1@9234.37,3009.17 9279.68,3009.17
  Top Layer w15: 9279.68,3009.17 9279.68,2936.7 9515,2701.38 OLED_CONNECTOR.6
SIWA_LED1: HEADER_GPIO.2 U3.1 | length 281.8
  Top Layer w15: HEADER_GPIO.2 8735.29,5050.29 9016.24,5050.29 U3.1
SIWA_LED2: HEADER_GPIO.4 U3.3 | length 302
  Top Layer w15: HEADER_GPIO.4 8812.19,4950 8861.6,4999.41 U3.3
SIWA_LED3: HEADER_GPIO.6 U4.1 | length 281.8
  Top Layer w15: HEADER_GPIO.6 8735.3,4850.3 9016.24,4850.3 U4.1
SIWA_LED4: HEADER_GPIO.8 U4.3 | length 302
  Top Layer w15: HEADER_GPIO.8 8815,4750 8864.41,4799.41 U4.3
SIWA_LED5: HEADER_GPIO.10 U5.1 | length 278.1
  Top Layer w15: HEADER_GPIO.10 U5.1
SIWA_LED6: HEADER_GPIO.12 U5.3 | length 298.3
  Top Layer w15: HEADER_GPIO.12 8810,4550 8858.82,4598.82 U5.3
SIWA_LED7: HEADER_GPIO.14 U6.1 | length 276.8
  Top Layer w15: HEADER_GPIO.14 8735.3,4450.3 9011.24,4450.3 U6.1
SIWA_LED8: HEADER_GPIO.16 U6.3 | length 297
  Top Layer w15: HEADER_GPIO.16 8825,4350 8874.41,4399.41 U6.3
SIWA_RES: HEADER_GPIO.36 U7.5 | length 473.3
  Top Layer w10: 9130.34,3270.83 U7.5
  Top Layer w15: HEADER_GPIO.36 9051.17,3350 9130.34,3270.83
SIWA_SA0: HEADER_GPIO.34 U7.4 | length 470.1
  Top Layer w10: 9130,3380 9175.13,3380 9175.47,3379.66 U7.4
  Top Layer w15: HEADER_GPIO.34 8805,3380 9130,3380
SIWA_SCL: HEADER_GPIO.40 U8.5 | length 545.7
  Top Layer w10: 9129.68,2899.17 9174.97,2899.17 9175.31,2899.51 U8.5@9175.31,2900.83
  Top Layer w15: HEADER_GPIO.40 8985.83,2899.17 9129.68,2899.17
SIWA_SDA: HEADER_GPIO.38 U8.4 | length 540.1
  Top Layer w10: 9129.68,3009.17 U8.4@9175.31,3009.17
  Top Layer w15: HEADER_GPIO.38 8888.85,3250 9129.68,3009.17
UART_RX: HEADER_GPIO.19 SIWA_SOCKET.24 | length 1561.5
  Bottom Layer w15: SIWA_SOCKET.24 7301.18,4070 8084.24,4070 8105.74,4048.5 8533.5,4048.5 HEADER_GPIO.19
UART_TX: HEADER_GPIO.17 SIWA_SOCKET.21 | length 1603
  Bottom Layer w15: SIWA_SOCKET.21 7543.33,4395 7789.83,4148.5 8533.5,4148.5 HEADER_GPIO.17
V_1.0V: HEADER_POWER.2 SIWA_SOCKET.06 SIWA_SOCKET.07 SIWA_SOCKET.22 SIWA_SOCKET.37 SIWA_SOCKET.54 SIWA_SOCKET.55 | length 4173.6
  Top Layer w15: SIWA_SOCKET.22 7400.59,4070.59 7400.59,3970 ; SIWA_SOCKET.07 SIWA_SOCKET.06 7900.59,4219.41 SIWA_SOCKET.55 ; HEADER_POWER.2 8085,2986.18 SIWA_SOCKET.37 7400.59,3970 ; SIWA_SOCKET.54 SIWA_SOCKET.55 ; 7400.59,3970 8092.71,3970 8117.71,3995 SIWA_SOCKET.55
V_1.8V: C10.1 C11.1 C13.2 C15.2 FLASH.3 FLASH.4 FLASH.7 HEADER_POWER.4 SIWA_SOCKET.09 SIWA_SOCKET.25 SIWA_SOCKET.44 SIWA_SOCKET.57 U1.5 U2.5 U7.3 U7.6 U8.3 U8.6 Y1.1 Y1.4 | length 9395.6
  Top Layer w10: C15.2@9161.57,2837.95 9173.31,2849.68 9176.26,2849.68 9195,2868.43 9195,3009.17 U8.3@9194.66,3009.51 ; C13.2 9163.15,3437.05 9194.82,3405.38 9194.82,3379.51 U7.3 U7.6 9195.16,3210.16 9195,3210 9195,3070 ; U8.3@9195.16,3009.33 9195.16,3070
  Top Layer w15: U1.5 6951.08,1734.9 6951.08,1717.31 6993.39,1675 C10.1 7065.79,1675.79 7122.5,1675.79 ; Y1.4 Y1.1 7196.21,1330 7205,1338.79 7205,1461.64 ; SIWA_SOCKET.25 7129.68,4141.5 7129.68,4514.26 7177.95,4562.53 7543.71,4562.53 SIWA_SOCKET.09 ; U2.5 7260,1685.36 7251.21,1676.57 C11.1 7179.21,1675.79 7122.5,1675.79 ; SIWA_SOCKET.44 8071.5,3841.5 8137.26,3841.5 8171.5,3875.74 8171.5,4014.26 8140.76,4045 8109.24,4045 8078.5,4075.74 8078.5,4148.5 SIWA_SOCKET.57 ; C15.2 9161.57,2832.05 9141.74,2812.21 9141.74,2809.97 8854.76,2523 8558,2523 HEADER_POWER.4 8138,2103 8062.32,2103 7918.5,1959.19 7918.5,1605.46 7774.69,1461.64 7205,1461.64 ; 7122.5,1675.79 7122.5,1544.14 7205,1461.64
  Bottom Layer w15: FLASH.7 6975,5090 FLASH.3 ; FLASH.4 FLASH.3 ; SIWA_SOCKET.44 8185,3386.18 HEADER_POWER.4 ; SIWA_SOCKET.57 8025,4195 SIWA_SOCKET.09 7593.09,4626.91 7593.09,4671.91 FLASH.3
V_3.0V: B1.4 C12.1 C14.1 C16.1 HEADER_POWER.6 OLED_CONNECTOR.2 OLED_CONNECTOR.3 U3.5 U4.5 U5.5 U6.5 | length 6167
  Top Layer w15: B1.4 7461.87,1626.32 7461.87,1719.7 C12.1 v1(7615,1720) ; HEADER_POWER.6 8635,2500 8960.2,2500 9232.05,2771.85 C16.1 9235.92,2770.93 9304.08,2770.93 v1(9305,2770) 9305,2710 OLED_CONNECTOR.2 OLED_CONNECTOR.3 9685,2670 9685,3216.08 9049.19,3851.89 9049.19,4433.79 ; U6.5 9057.97,4425 9049.19,4433.79 ; U5.5 9079.41,4625 9057.97,4625 9049.19,4633.79 ; U4.5 9049.19,4825 ; U3.5 9058.79,5025 9049.19,5015.4 9049.19,4825 ; C14.1 9304.41,3146.85 v1(9304.47,3146.9) ; 9049.19,4433.79 9049.19,4633.79 ; 9049.19,4633.79 9049.19,4825
  Bottom Layer w15: v1(7615,1720) 7992,2097 8232,2097 HEADER_POWER.6 ; v1(9304.47,3146.9) 9304.73,3146.64 9304.73,2770.27 v1(9305,2770)
V_EXT: C1.2 C4.2 C7.2 HEADER_POWER.7 REG_1.8V.1 REG_1.8V.3 REG_1V.1 REG_1V.3 REG_3V.1 REG_3V.3 | length 3088.4
  Top Layer w15: REG_1V.1 8133.92,1452.79 8133.92,1477.5 8144.14,1487.73 8172.42,1487.73 8182.64,1477.5 REG_1V.3@8182.64,1452.79 ; REG_1V.3 8183.87,1443.69 REG_1V.3@8185.23,1442.33 ; C1.2@8184.46,1373.01 REG_1V.3@8184.46,1454.78 ; REG_1V.3@8184.46,1452.32 REG_1V.3@8185.23,1451.56 ; C1.2 8185.44,1370.06 8194.68,1360.83 8197.63,1360.83 8277.45,1281 8555,1281 ; HEADER_POWER.7 8620.77,2050 9199.06,1471.71 9199.06,1372.26 9109.91,1283.12 9042.74,1283.12 ; C4.2@8427.22,1437.21 8428.77,1438.77 8516.25,1438.77 REG_1.8V.1 8517.45,1438.79 8546.21,1438.79 8555,1430 8555,1400.48 ; REG_1.8V.3 8517.47,1388.81 8543.33,1388.81 8555,1400.48 ; C7.2 8929.17,1396.69 9005.78,1396.69 REG_3V.3 9006.45,1396.77 9031.77,1396.77 9045,1410 ; REG_3V.1 9006.45,1447.2 9031.77,1447.2 9045,1433.98 9045,1410.64 9042.74,1408.39 9042.74,1283.12 ; 8555,1281 8557.11,1283.12 9042.74,1283.12 ; 8555,1281 8555,1400.48
pads on no net: HEADER_CLK/RESET.5 HEADER_CLK/RESET.6 HEADER_CLK/RESET.7 HEADER_CLK/RESET.8 HEADER_GPIO.25 HEADER_GPIO.27 HEADER_GPIO.29 HEADER_GPIO.31 OLED_CONNECTOR.8 SIWA_SOCKET.01 SIWA_SOCKET.32 SIWA_SOCKET.48 SIWA_SOCKET.49 U1.1 U1.6 U2.4

## Polygon pours and split planes (outlines as drawn)
GND on Bottom Layer "GND_L02_P001" (solid, pour order 1): 6545.2,5579.81 10088.31,5579.81 10088.31,2041.7 10088.31,860 6545.2,860.2
GND on Top Layer "GND_L01_P000" (solid, pour order 0): 6550.39,5584.62 10088.31,5584.62 10088.31,860 6549.45,860

## Keep-outs
Top Layer:
  rectangle: 6545,5388.15 10088.31,5585
  rectangle: 6545,860.59 6741.85,5585
  rectangle: 9888.15,855.59 10085,5580
  rectangle: 6545,860.59 10088.31,1057.44
Bottom Layer:
  rectangle: 6546.69,5388.15 10090,5585
  rectangle: 9890,855.59 10086.85,5580
  rectangle: 6546.69,858.74 10090,1055.59
  rectangle: 6545,860.59 6741.85,5585

## Silkscreen, mask and mechanical layers (free items; w line width, h text height)
Mechanical 1:
  the board outline again, w10